# Altium PCB PCB_DCDC_Test.PcbDoc
Units mil, origin at the board's own origin, x right, y up, seen from the top; angles counter-clockwise.
Board outline 3670 x 2420 mil, 2 copper layers (Top Layer, Bottom Layer); 19 components, 13 nets, 53 pads, 8 vias.
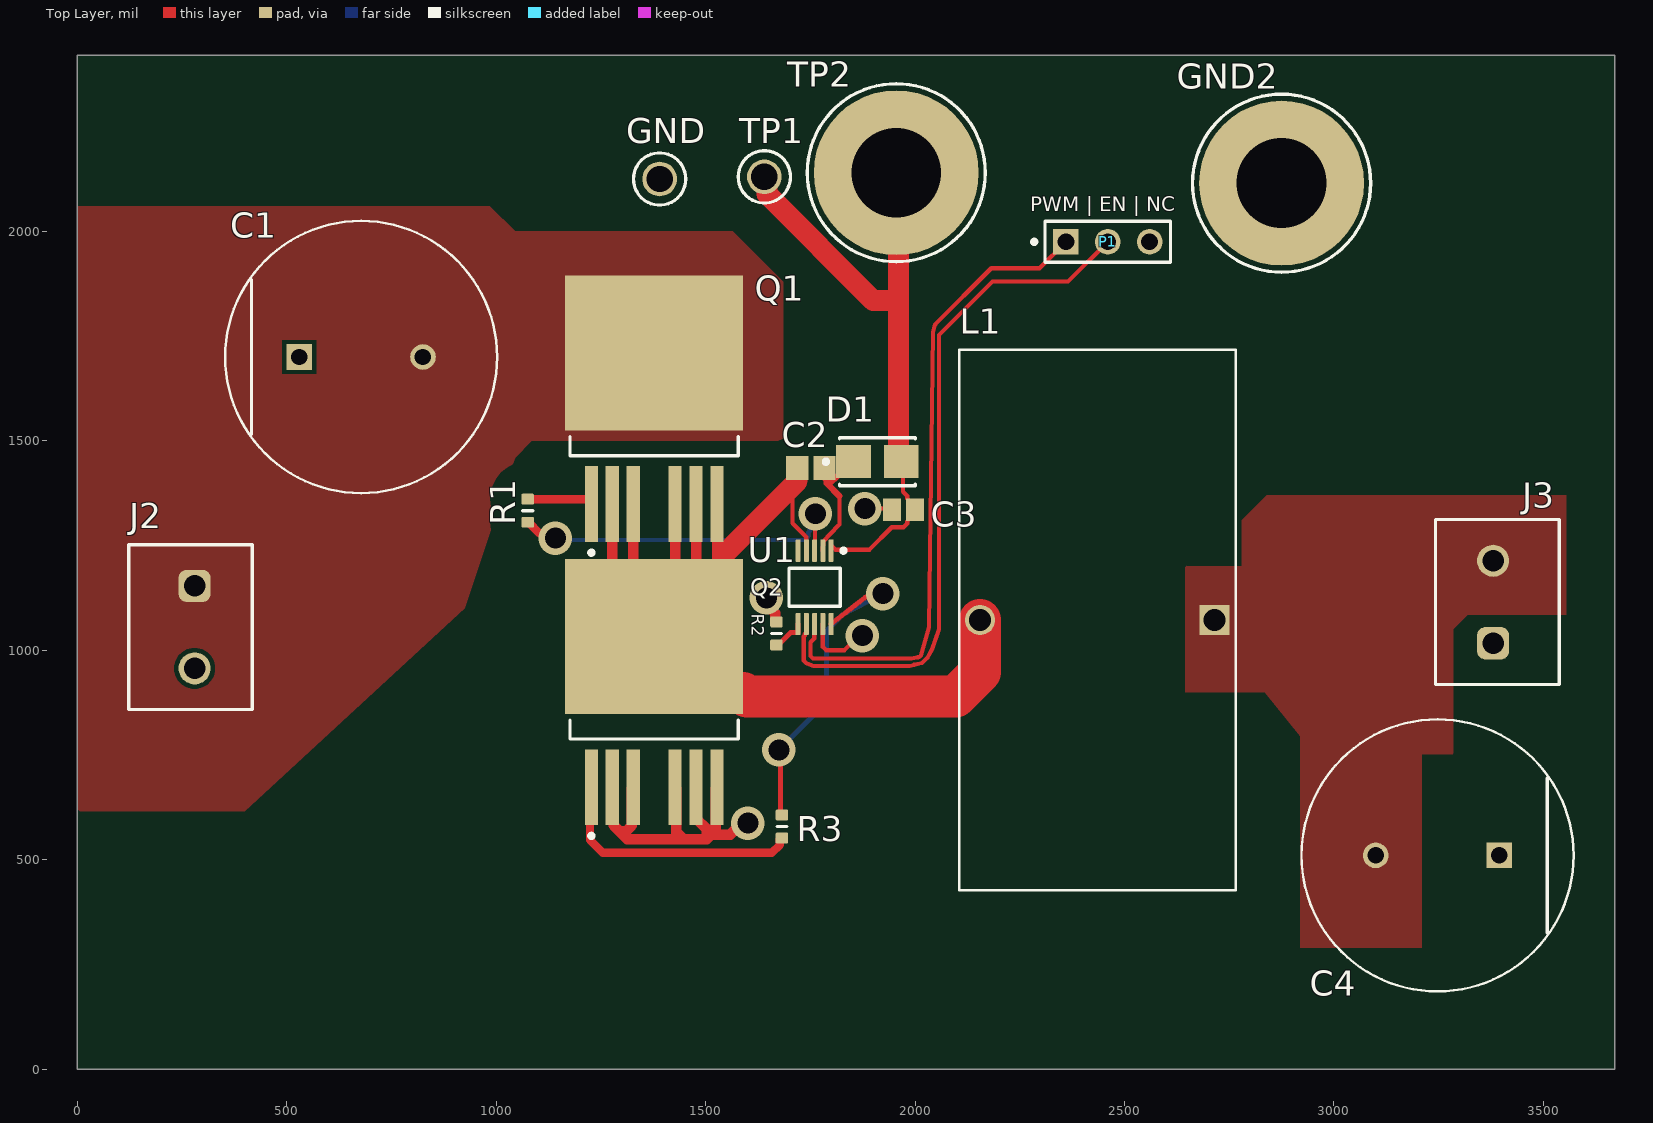
[diagram p0: Top Layer view]
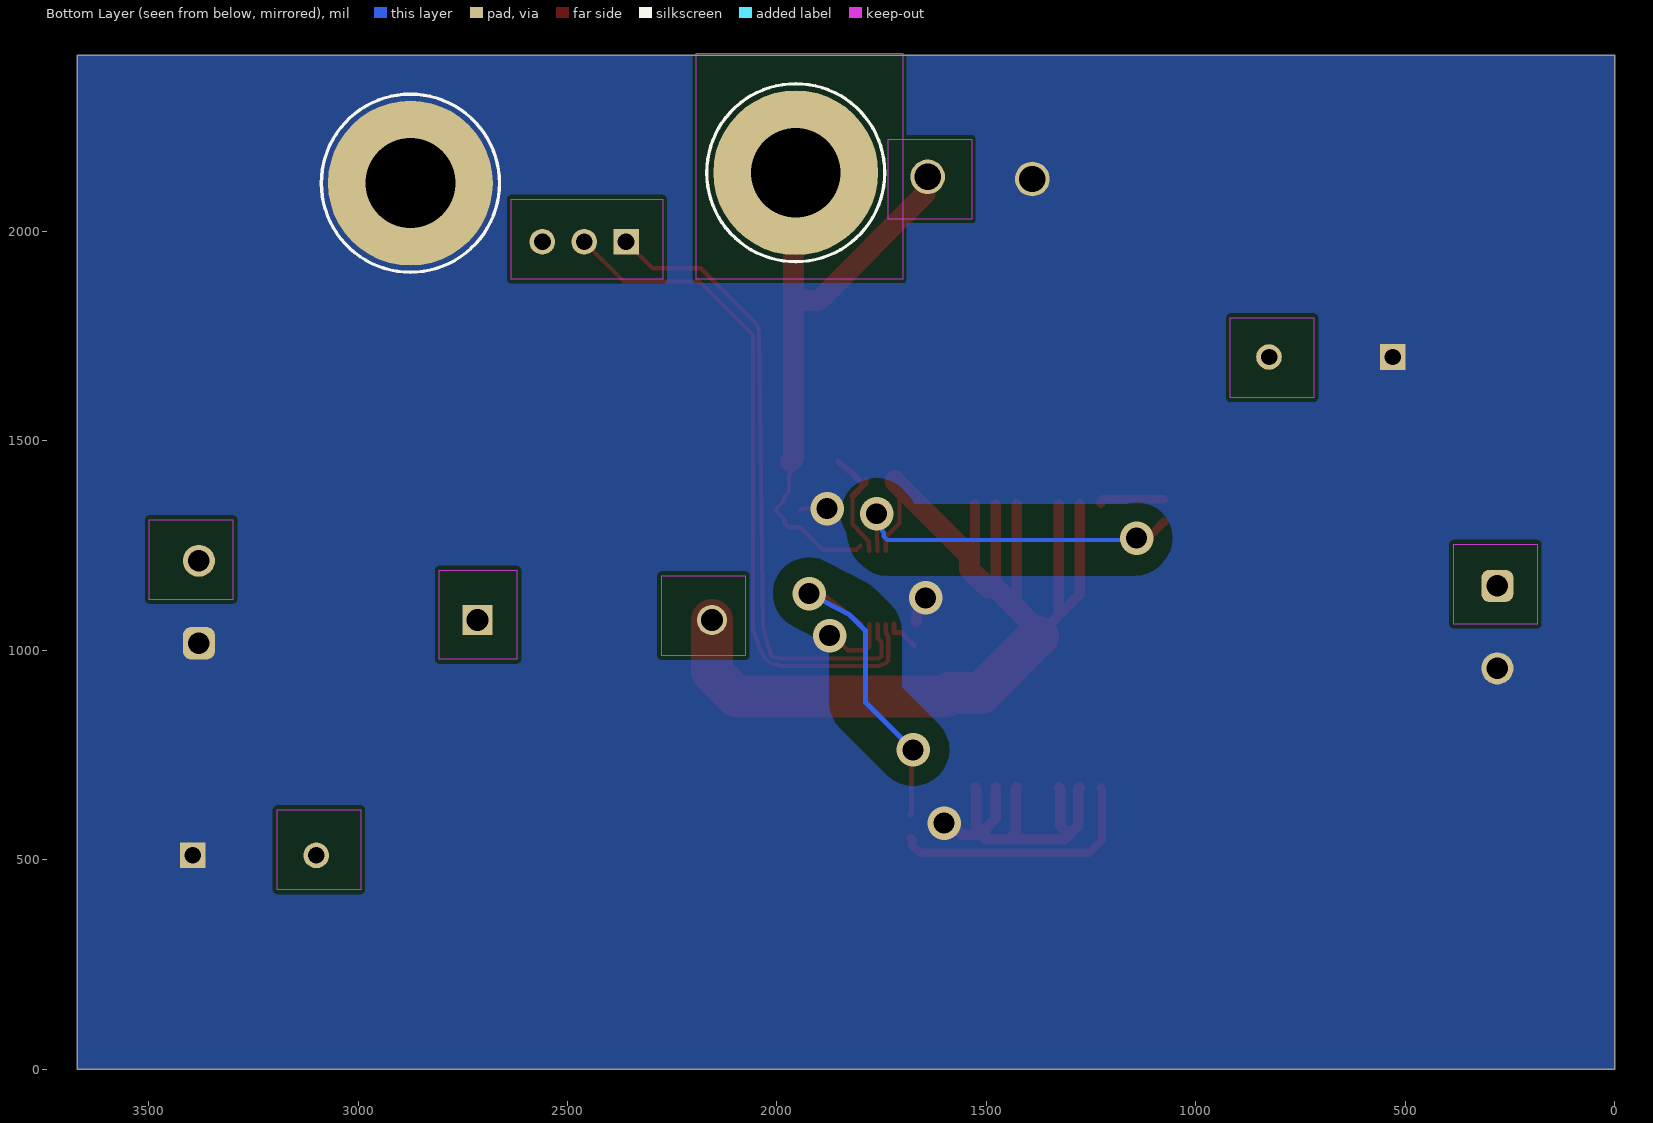
[diagram p1: Bottom Layer view, seen from below]
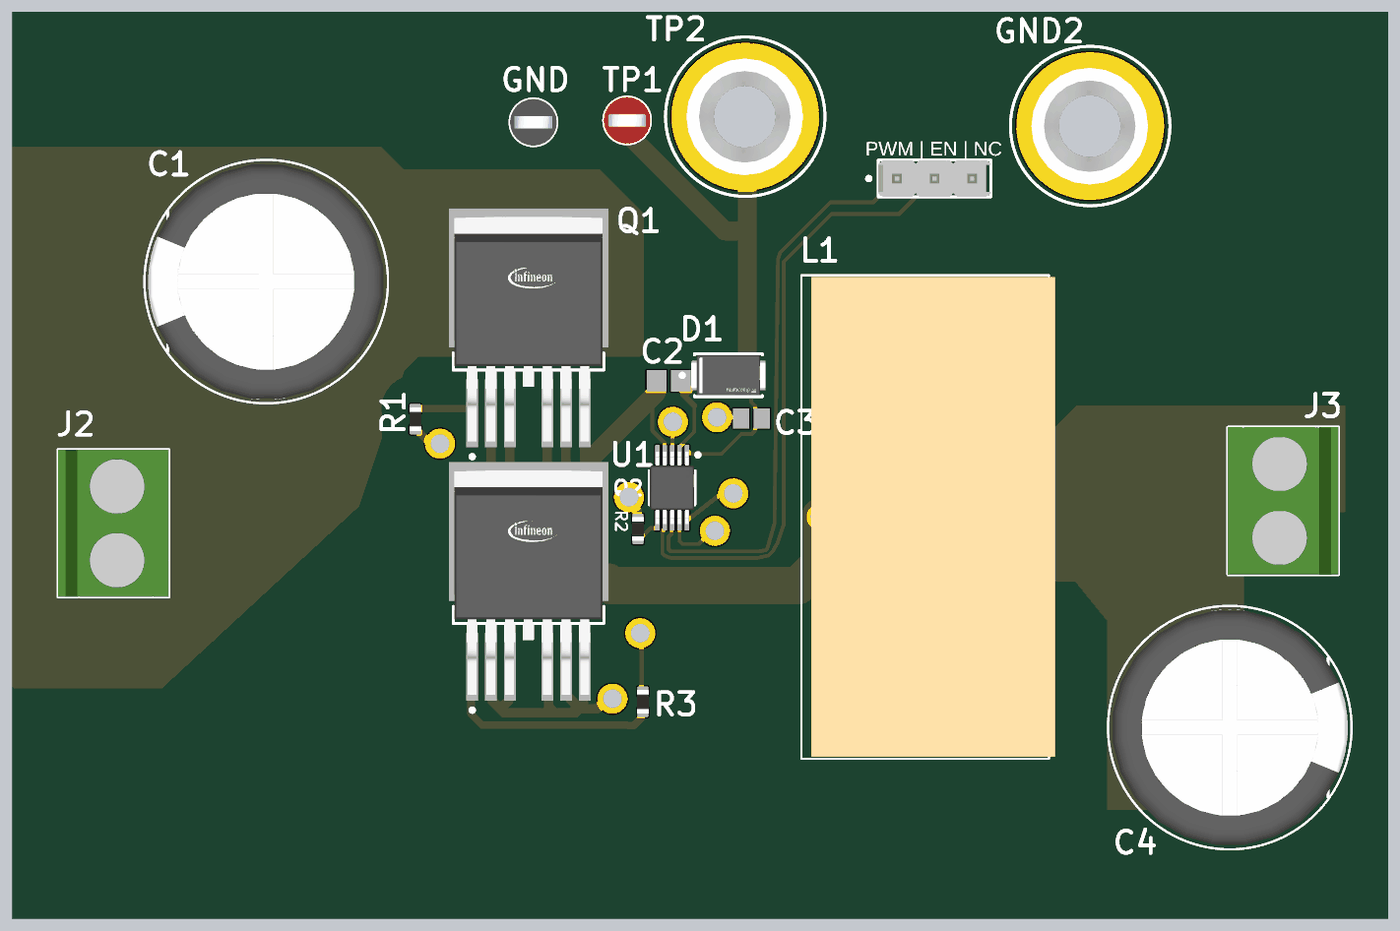
[diagram p2: 3D render of the assembled board from above, using the file's embedded part models]

## Layer stack, top to bottom
Top Solder: solder mask 0.4, Solder Resist, Dk 3.5
Top Layer: signal copper 1.4
Dielectric 1: core 12.6, FR-4, Dk 4.8
Bottom Layer: signal copper 1.4
Bottom Solder: solder mask 0.4, Solder Resist, Dk 3.5

## Board outline
0,0 3670,0 3670,2420 0,2420

## Design rules (kind name [scope] priority, off if disabled: settings)
AssemblyTestPointUsage [All] p1: isadvanced=TRUE
AssemblyTestpoint [All] p1: isadvanced=TRUE testpointundercomponent=TRUE minsize=40 maxsize=100 preferedsize=60 minholesize=0 maxholesize=40 preferedholesize=32 testpointgrid=1 usegrid=TRUE gridtolerance=0.01 allowsidetop=TRUE allowsidebottom=TRUE
Clearance Clearance_2 [InComponent('U1')] p1: isadvanced=TRUE gap=10 ignorepadtopadclearanceinfootprint=TRUE except(0: Arc-Arc Arc-Track Arc-SMDPad Arc-Text Track-Track Track-SMDPad Track-THPad Track-Via Track-Text SMDPad-SMDPad SMDPad-Text Text-Text)
Clearance Clearance_3 [All] p2: isadvanced=TRUE gap=10 ignorepadtopadclearanceinfootprint=TRUE except(5: Arc-Arc Arc-Track Arc-Text Track-Track Track-Text Text-Text; 80: Track-Poly)
Clearance Clearance_1 [OnMid vs OnMid] p3: gap=10 ignorepadtopadclearanceinfootprint=FALSE sourcerule=44 cellrowname=All cellrowtype=0 cellcolname=All cellcoltype=0 innerlayers=TRUE
Clearance Clearance_2 [(ExistsOnLayer('Top Layer') Or ExistsOnLayer('Bottom Layer')) vs (ExistsOnLayer('Top Layer') Or ExistsOnLayer('Bottom Layer'))] p4: gap=10 ignorepadtopadclearanceinfootprint=FALSE sourcerule=44 cellrowname=All cellrowtype=0 cellcolname=All cellcoltype=0 outerlayers=TRUE
Clearance [All] p5: gap=10 ignorepadtopadclearanceinfootprint=FALSE ismatrix=TRUE
ComponentClearance [All] p1: isadvanced=TRUE gap=10 collisioncheckmode=3 verticalgap=10 showdistances=FALSE
FabricationTestPointUsage [All] p1: isadvanced=TRUE valid=0 allowmultiple=FALSE
FabricationTestpoint [All] p1: isadvanced=TRUE side=3 testpointundercomponent=TRUE minsize=40 maxsize=100 preferedsize=60 minholesize=0 maxholesize=40 preferedholesize=32 testpointgrid=1 allowsidetop=TRUE allowsidebottom=TRUE usegrid=TRUE gridtolerance=0.01
FanoutControl Fanout_BGA [IsBGA] p1: isadvanced=TRUE bgadir=Out bgaviamode=Centered fanoutstyle=Auto fanoutdirection=Alternating viagrid=1 // Fanout_BGA (Default Rule)
FanoutControl Fanout_LCC [IsLCC] p2: isadvanced=TRUE bgadir=Out bgaviamode=Centered fanoutstyle=Auto fanoutdirection=Alternating viagrid=1 // Fanout_LCC (Default Rule)
FanoutControl Fanout_SOIC [IsSOIC] p3: isadvanced=TRUE bgadir=Out bgaviamode=Centered fanoutstyle=Auto fanoutdirection=Alternating viagrid=1 // Fanout_SOIC (Default Rule)
FanoutControl Fanout_Small [(CompPinCount < 5)] p4: isadvanced=TRUE bgadir=Out bgaviamode=Centered fanoutstyle=Auto fanoutdirection=OutThenIn viagrid=1 // Fanout_Small (Default Rule)
FanoutControl Fanout_Default [All] p5: isadvanced=TRUE bgadir=Out bgaviamode=Centered fanoutstyle=Auto fanoutdirection=Alternating viagrid=1 // Fanout_Default (Default Rule)
Height MaxMinHeight_1 [InComponent('L1')] p1: isadvanced=TRUE minheight=0 maxheight=10000 prefheight=5000
Height [All] p2: isadvanced=TRUE minheight=0 maxheight=1000 prefheight=500
HoleSize [All] p1 off: isadvanced=TRUE absolutevalues=TRUE maxlimit=100 minlimit=1 maxpercent=80.000 minpercent=20.000
HoleToHoleClearance [All] p1: isadvanced=TRUE gap=10 allowstackedmicrovias=TRUE
LayerPairs [All] p1: isadvanced=TRUE enforce=TRUE
MinimumSolderMaskSliver [All] p1 off: isadvanced=TRUE minsoldermaskwidth=10
NetAntennae [All] p1: isadvanced=TRUE netantennaetolerance=0
PasteMaskExpansion [All] p1: isadvanced=TRUE expansion=0
PlaneClearance [All] p1: isadvanced=TRUE clearance=20
PlaneConnect [All] p1: isadvanced=TRUE planeconnectstyle=Direct reliefexpansion=20 reliefentries=4 reliefconductorwidth=10 reliefairgap=10
PolygonConnect [All] p1: connectstyle=Direct reliefconductorwidth=10 reliefentries=4 polygonreliefangle="90 Angle" airgapwidth=10
RoutingCorners [All] p1: isadvanced=TRUE cornerstyle=45-Degree minsetback=100 maxsetback=100
RoutingPriority [All] p1: isadvanced=TRUE routingpriority=0
RoutingVias [All] p1: holewidth=28 width=50 viastyle="Through Hole" minholewidth=28 minwidth=50 maxholewidth=28 maxwidth=50
ShortCircuit [All] p1: isadvanced=TRUE allowed=FALSE
SilkToSilkClearance [All] p1 off: isadvanced=TRUE silktosilkclearance=5
SilkToSolderMaskClearance [IsPad] p1 off: isadvanced=TRUE minsilkscreentomaskgap=10 clearancetoexposedcopper=TRUE
SolderMaskExpansion [All] p1: isadvanced=TRUE expansion=4 istentingtop=FALSE
SupplyNets "Schematic Supply Nets_7" [InNet('GND')] p1: isadvanced=TRUE voltage=0.000
SupplyNets "Schematic Supply Nets_2" [InNet('GND_SIGNAL')] p2: isadvanced=TRUE voltage=0.000
SupplyNets "Schematic Supply Nets_4" [InNet('12V')] p3: isadvanced=TRUE voltage=0.000
UnRoutedNet [All] p1: isadvanced=TRUE
UnpouredPolygon [All] p1: isadvanced=TRUE
Width MaxMinWidth_2 [InNet('SW')] p1: isadvanced=TRUE maxlimit=100 minlimit=10 preferedwidth=10 minimp=50.000000 maximp=50.000000 favimp=50.000000
Width MaxMinWidth_1 [All] p2: isadvanced=TRUE maxlimit=50 minlimit=10 preferedwidth=10 minimp=50.000000 maximp=50.000000 favimp=50.000000
Width [All] p3: maxlimit=10 minlimit=10 preferedwidth=10
4 further rules are at their usual default settings.

## Components (designator, comment, footprint, x,y, rotation, side; value= is the part's Value field where it differs from the comment)
C1 "EEUFC2A471" FP-RAD-TH-D_16_0_5-L_40_2-MFG 677.36,1700 r0 top
C2 "08051C153KAT2A" CAPC2013X94X50NL20T25 1751,1435 r0 top
C3 "150nF" CAPC2013X140X50LL20T25 1972.09,1335 r0 top
C4 "EEUFC2A471" FP-RAD-TH-D_16_0_5-L_40_2-MFG 3247.36,510 r180 top
D1 "1N4007 SMD" FP-1N4007_SMD-IPC_C 1910,1450 r0 top
GND "5011" KSTN-5011_V 1390,2125 r0 top
GND2 "575-4" KSTN-575-4 2875,2115 r0 top
J2 "691137710002" 691137710002 270,1055 r270 top
J3 "691137710002" 691137710002 3390,1115 r90 top
L1 "120uH" IND_2300HT-V_56_42 2715,1072 r180 top
P1 "22-28-4033" MOLX-22-28-4033_V 2460,1975 r0 top
Q1 "IPB032N10N5ATMA1" FP-PG-TO263-7-MFG 1377,1650.18 r0 top
Q2 "IPB032N10N5ATMA1" FP-PG-TO263-7-MFG 1377,974 r0 top
R1 "0R3J" RESC0603(1608)_L 1075,1333 r90 top value=0
R2 "0R3J" RESC0603(1608)_L 1669,1040 r270 top value=0
R3 "0R3J" RESC0603(1608)_L 1682,579 r270 top value=0
TP1 "5010" KSTN-5010_V 1640,2130 r0 top
TP2 "575-4" KSTN-575-4 1955,2140 r0 top
U1 "LM5106MM/NOPB" DGS0010A_N 1760,1150 r270 top

## Footprints (in the part's own frame and the unit in brackets; to place one, negate y for a bottom-side part, rotate by r counter-clockwise, add the part's x,y. Pads: shape width x height; smd on the part's side, far side on the other; paste and mask are expansions set on the pad)
691137710002 [mm] "Horizontal Cable Entry with Pressure Clamp, pitch 5mm, 02p"
  rrect50% 1.95x1.95 hole 1.3: 1(-2.5,0.25)
  round 1.95 hole 1.3: 2(2.5,0.25)
  silkscreen extent -5,-3.75 5,3.75, body extent -5,-3.75 5,3.75, height 11.6
CAPC2013X94X50NL20T25 [mm] "Chip Capacitor, 2-Leads, Body 2.01x1.25mm, IPC Medium Density"
  rect 1.35x1.45 smd: 1(-0.825,0) 2(0.825,0)
  body extent -1.1,-0.72 1.11,0.72, height 0.94
CAPC2013X140X50LL20T25 [mm] "Chip Capacitor, 2-Leads, Body 2.00x1.25mm, IPC High Density"
  rect 1.1x1.35 smd: 1(-0.7,0) 2(0.7,0)
  body extent -1.1,-0.72 1.1,0.72, height 1.4
DGS0010A_N [mm] "SOP, 10-Leads, Body 3.1x3.1mm, Pitch 0.5mm, IPC Medium Density"
  rrect33% 1.35x0.3 smd: 1(-2.225,1) 2(-2.225,0.5) 3(-2.225,0) 4(-2.225,-0.5) 5(-2.225,-1) 6(2.225,-1) 7(2.225,-0.5) 8(2.225,0) 9(2.225,0.5) 10(2.225,1)
  silkscreen extent -2.35,-1.55 1.15,1.88, body extent -2.45,-1.5 2.45,1.5, height 0.94
FP-1N4007_SMD-IPC_C [mm]
  rect 2.1x2 smd paste+0 mask+0: 1(-1.45,0) 2(1.45,0)
  silkscreen extent -3.25,-1.45 2.3,1.45, body extent -2.6,-1.55 2.6,1.55, height 0.25
FP-PG-TO263-7-MFG [mm]
  rect 0.8x4.6 smd paste+0 mask+0: 1(-3.81,-7.65) 2(-2.54,-7.65) 3(-1.27,-7.65) 5(1.27,-7.65) 6(2.54,-7.65) 7(3.81,-7.65)
  rect 10.8x9.4 smd paste+0 mask+0: 8(0,1.5)
  silkscreen extent -5.1,-10.72 5.1,-3.58, body extent -5.5,-10.05 5.5,6.3, height 0.25
FP-RAD-TH-D_16_0_5-L_40_2-MFG [mm]
  rect 1.55x1.55 hole 1 paste-2539.97 mask+0: 1(-3.75,0)
  round 1.55 hole 1 paste-2539.97 mask+0: 2(3.75,0)
  silkscreen extent -8.25,-8.25 8.25,8.25, body extent -8.35,-8.35 8.35,8.35, height 0.25
IND_2300HT-V_56_42 [mil]
  rect 72x72 / inner round 60 / far side rect 72x72 hole 52 paste-99999 mask+0: 1(0,0)
  round 72 / inner round 60 / far side round 72 hole 52 paste-99999 mask+0: 2(560,0)
  silkscreen extent -50,-645 610,645, body extent -66,-640 584,640, height 1280
KSTN-575-4 [mm] "Banana Jack, Non-Insulated, Dia 7.92mm"
  round 10 hole 5.45: 1(0,0)
  silkscreen extent -5.4,-5.4 5.4,5.4, body extent -3.98,-3.96 3.92,3.94, height 2.36
KSTN-5010_V [mm] "Test Point, Dia 3.17mm"
  round 2.1 hole 1.6: 1(0,0)
  silkscreen extent -1.59,-1.58 1.59,1.58, body extent -1.59,-1.59 1.59,1.59, height 8.13
KSTN-5011_V [mm] "Test Point, Dia 3.17mm"
  round 2.1 hole 1.6: 1(0,0)
  silkscreen extent -1.59,-1.58 1.59,1.58, body extent -1.59,-1.59 1.59,1.59, height 8.13
MOLX-22-28-4033_V [mm] "THD, 3-Leads, Body 7.62x2.49mm, Pitch 2.54mm"
  rect 1.55x1.55 hole 1.02: 1(-2.54,0)
  round 1.55 hole 1.02: 2(0,0) 3(2.54,0)
  silkscreen extent -4.58,-1.24 3.81,1.24, body extent -3.81,-1.24 3.81,1.24, height 8.38
RESC0603(1608)_L [mil] "Chip Resistor, Body 1.6x0.8mm, IPC High Density"
  rrect25% 26x29.92 smd: 1(-27.56,0) 2(27.56,0)
  silkscreen extent 0,-12 0,12, body extent -31,-16 31,16, height 18

## Part data
C1 C4: library part CMP-05427-000270-1, "Aluminum Electrolytic Capacitors (Radial Lead Type) AEC-Q200 Qualified 470uF ±20% 100V", Capacitance=470uF, Case/Package=Radial, Dielectric Material=Aluminium, ESR (Equivalent Series Resistance)=47mR, Leakage Current=3uA, Max Operating Temperature=105°C, Min Operating Temperature=-55°C, Package Quantity=100, Ratings=AEC-Q200, Ripple Current=1.92A, Tolerance=20%, Voltage=100V, Construction=RADIAL, Contact Plating=Tin, Diameter=16mm, Height=40mm, Height - Seated (Max)=1.575inch, Impedance=47mR, Lead Diameter=0.8mm, Lead Free="Lead Free", Lead Pitch=7.5mm, Length=40mm, Life (Hours)=5000Hour, Mount="Through Hole", Packaging=Bulk, Polarity=Polar, Radiation Hardening=No, REACH SVHC="No SVHC", RoHS Compliant=Yes, Series=FC, Termination=Radial, Voltage Rating=100V, Voltage Rating (DC)=100V
C2: library part CMP-2007-04180-1, Manufacturer="AVX Interconnect / Elco", Part Number=08051C153KAT2A
C3: library part CMP-1036-04480-3, "08053C154KAT2A", Manufacturer="AVX Interconnect / Elco", Part Number=08053C154KAT2A
D1: library part CMP-12389-000001-1, "Rectifier, 1Kv, 1A, Do-214Ac Rohs Compliant: Yes"
GND: library part CMP-1672-00003-4, "Test Point, Black, Through Hole, RoHS, Bulk", Colour=Black, Manufacturer=Keystone, Package Quantity=100, ComponentLink1Description="Manufacturer URL", ComponentLink1URL=http://www.keyelco.com/, ComponentLink2Description=Datasheet, ComponentLink2URL=http://www.keyelco.com/product-pdf.cfm?p=1320, Contact Material=Bronze, Contact Plating=Silver, DatasheetVersion="Rev. F, 12/2013", Height="8.12 mm", Mount="Through Hole", Mounting Technology="Through Hole", PackageDescription="1-Pin Through Hole Device, Dia 3.17 mm", PackageReference=5011, Packaging=Bulk, Pins=1, REACH SVHC="No SVHC", RoHSCompliant=true
GND2 TP2: library part CMP-2000-05649-1, "Banana Jack, Non-Insulated, 1-Pin THD, RoHS, Bulk", Color=-, Manufacturer=Keystone-Electronics, Package Description="1-Pin Through Hole Device, Dia 7.92 mm", Package Version="Rev. B, 11/1994", Body Material=-, Category=Connectors,Interconnects, Contact Finish=Nickel, Contact Material=Brass, Datasheet URL=http://www.keyelco.com/product-pdf.cfm?p=2379, Datasheet Version="Rev. B, 11/1994", Family=BananaandTipConnectors-Jacks,Plugs, Features=-, Gender=Female, Insulation=Non-Insulated, Manufacturer URL=http://www.keyelco.com/, Mounting Technology=ThroughHole, Mounting Type=ThroughHole, Operating Temperature=-, Package Reference=575-4, Package URL=http://www.keyelco.com/product-pdf.cfm?p=2379, Packaging=Bulk, Plug/Mating Plug Diameter=StandardBanana, Series=-, Termination=Solder, Type=BananaJack, Wire Gauge=-
J2 J3: library part CMP-1502-03324-2, Current Rating=16A, Max Operating Temperature=120°C, Min Operating Temperature=-30°C, Voltage Rating=300V, Contact Material="Nickel, Tin", Height=11.6mm, Lead Pitch=5mm, NexarPartId=78871135, Number of Contacts=2, Number of Pins=2, Number of Rows=1, Packaging=Box, RoHS=Non-Compliant
L1: library part 2300HT-121-V-RC, "120uH / 2300HT-121-V-RC", Mfr_Name="Bourns Electronics"
P1: library part CMP-1676-00001-5, "Male Header, Pitch 2.54 mm, 1 x 3 Position, Height 8.38 mm, Tail Length 3.18 mm, RoHS, Bulk", Colour=Black, Current Rating="4 A", Manufacturer=Molex, Max Operating Temperature="75 degC", Min Operating Temperature="0 degC", Package Quantity=1, Voltage Rating="250 V", ComponentLink1Description="Manufacturer URL", ComponentLink1URL=http://www.molex.com/, ComponentLink2Description=Datasheet, ComponentLink2URL=http://www.molex.com/pdm_docs/sd/022284033_sd.pdf, Contact Finish=Gold, Contact Material=Brass, Contact Plating=Gold, DatasheetVersion="Rev. G, 01/2012", Height="8.38 mm", Lead Pitch="0.1 inch", Length="7.62 mm", Mount="Through Hole", Mounting Technology="Through Hole", PackageDescription="Male Header, Pitch 2.54 mm, 1 x 3 Position, Height 8.38 mm, Tail Length 3.18 mm", PackageReference=22-28-4033, Packaging=Bulk, Pins=3, REACH SVHC=Unknown, RoHSCompliant=true, Rows=1
Q1 Q2: library part CMP-32901-001276-1, "MOSFET N-CH 100V 166A TO263-7", Case/Package=TO-263-7, Continuous Drain Current (ID)=166A, Drain to Source Voltage (Vdss)=100V, Input Capacitance=6.97nF, Max Operating Temperature=175°C, Max Power Dissipation=187W, Min Operating Temperature=-55°C, Halogen Free="Halogen Free", Lead Free="Contains Lead", Max Dual Supply Voltage=100V, Mount="Surface Mount", Packaging="Tape and Reel", Rds On Max=3.2mR, RoHS Compliant=Yes, Series=OptiMOS™
R1 R2 R3: library part CMP-009-00063-2, "Jumper 0603 (1608 Metric)", Case/Package=0603, Mounting Technology=SMT, Pins=2
TP1: library part CMP-1672-00002-4, "Test Point, Red, Through Hole, RoHS, Bulk", Colour=Red, Manufacturer=Keystone, Package Quantity=100, ComponentLink1Description="Manufacturer URL", ComponentLink1URL=http://www.keyelco.com/, ComponentLink2Description=Datasheet, ComponentLink2URL=http://www.keyelco.com/product-pdf.cfm?p=1319, Contact Material=Bronze, Contact Plating=Silver, DatasheetVersion="Rev. F, 12/2013", Height="8.12 mm", Mount="Through Hole", Mounting Technology="Through Hole", PackageDescription="1-Pin Through Hole Device, Dia 3.17 mm", PackageReference=5010, Packaging=Bulk, Pins=1, REACH SVHC="No SVHC", RoHSCompliant=true
U1: library part CMP-0063-01354-3, "100V Half-Bridge Gate Driver with Programmable Dead-Time, 10-pin MSOP, Pb-Free", Manufacturer="Texas Instruments", PackageTopMarking=ZXTT*5106, PowerWise=N, Code_JEDEC=MO-187-BA, ComponentLink1Description="Datasheet URL", ComponentLink1URL=http://www.ti.com/general/docs/lit/getliterature.tsp?genericPartNumber=LM5106&fileType=pdf, CompType=MiscPower, PackageDescription="Mini-SO, Molded, .118 x .118 x .034in Body, 10 Lead, .0197in Pitch", PackageReference=DGS0010A, PinCount=10, RoHS=Y

## Via types
v1: diameter 80, hole 50, Top Layer to Bottom Layer, 8 vias

## Nets (pads, with @x,y where several pads share a name; then routed paths per layer and width w, separated by ;. In a path a pad name is that pad's centre, name@x,y a point inside that pad or via, vN(x,y) a via of type N, cw(c..) or ccw(c..) an arc to the next point about the centre after c; other vN are vias at no path point)
12V: C3.2 D1.2 TP1.1 TP2.1 U1.1 | length 1547.4
  Top Layer w10: U1.1@1800.59,1249.41 1810,1240 1890.77,1240 1944.19,1293.43 1972.4,1293.43 1981.19,1302.21 1981.19,1307.57 1983,1309.38 1983,1313.43 C3.2@2004.57,1335 ; D1.2 1959.5,1448.42 1955.22,1444.14 1955.22,1436.68 1970.75,1421.16 1970.75,1378.23 1981.19,1367.79 1981.19,1362.43 1983,1360.62 1983,1356.57 C3.2@2004.57,1335 ; C3.2@2004.57,1335 2004.88,1335 C3.2@2004.57,1335
  Top Layer w50: TP1.1 1646.25,2123.75 1646.25,2088.75 1900,1835 1960,1835 ; TP2.1@1960,2135 1960,1835 ; D1.2 1960,1457.09 1960,1835
GND: C1.1 C3.1 C4.1 GND2.1 GND.1 J2.2 J3.1 Q2.2 Q2.3 Q2.5 Q2.6 Q2.7 R2.1 U1.9 | length 1230.9
  Top Layer w10: U1.9 1779.69,1007.31 1787,1000 1831.35,1000 1866.35,1035 v1(1874.13,1035) ; v1(1880,1338) 1941.53,1338 C3.1
  Top Layer w25: Q2.2 1280.25,669.57 1280.25,581.45 1294.2,567.5 ; Q2.3 1323.75,669.57 1323.75,581.45 1309.8,567.5 1294.2,567.5 ; Q2.5 1430.25,669.57 1430.25,565.75 1447,549 ; Q2.6 1477,598.02 1502,573.02 1502,559.88 ; 1523.75,570.75 1523.75,669.57 Q2.7 ; v1(1601,587) 1586.12,587 1558.99,559.88 1512.88,559.88 1502,549 1447,549 ; v1(1645,1125) 1645,1110.12 1666.54,1088.58 1666.54,1068.06 1667.04,1067.56 R2.1 ; 1294.2,567.5 1312.7,549 1447,549
NetC1_2: C1.2 J2.1 Q1.8
NetC2_2: C2.2 D1.1 U1.2 | length 282.4
  Top Layer w10: U1.2 1780.59,1259.17 1816.63,1297.46 1819.35,1300.34 1819.35,1368.15 ; C2.2@1783.72,1407.84 1789.24,1401.82
  Top Layer w15: 1789.24,1402.33 1789.24,1401.82 1789.24,1398.25 1819.35,1368.15 ; 1793.02,1394.59 1819.08,1420.64 D1.1
NetC4_2: C4.2 J3.2 L1.1
NetP1_1: P1.1 U1.8 | length 1536.3
  Top Layer w10: U1.8 1759.09,1061.5 1759.09,1027.99 1750.17,1019.06 1750.17,990 1750.17,985.86 1756.03,980 1991.49,980 2006.84,982.99 2009.83,983.58 2013.82,987.56 2033.01,1054.36 2033.03,1055.7 2042.38,1758.59 2047.93,1777.93 2181.82,1911.82 2296.82,1911.82 P1.1
NetP1_2: P1.2 U1.7 | length 1666.1
  Top Layer w10: U1.7 1740.32,1041.73 1736.63,1038.05 1736.63,1035.29 1734,1032.66 1734,975 1739.86,969.14 1753.76,963.36 1757.6,962.59 1982.62,962.59 1986.72,962.59 1997.71,965 2005.49,966.89 2016.63,969.16 2028.82,981.35 2040.4,1001.59 2057.38,1049.96 2057.38,1752.38 2185,1880 2365,1880 P1.2
NetQ1_1: Q1.1 R1.2 | length 160.2
  Top Layer w20: R1.2 1221.25,1360.56 1227,1354.81 Q1.1
NetQ2_1: Q2.1 R3.2 | length 620.8
  Top Layer w20: Q2.1 1223.75,669.57 1223.75,546.72 1253.97,516.5 1640.5,516.5 1641.05,515.95 1657.62,515.95 1677.04,535.36 1677.04,548.44 1680.04,551.44 R3.2
NetR1_1: R1.1 U1.3 | length 844.1
  Top Layer w10: U1.3 1760,1258.27 1760.91,1259.17 1760.91,1324.69 v1(1762,1325.78)
  Top Layer w20: R1.1@1076.06,1306.5 R1.1 1076.96,1305.44 1103.36,1279.04 1129.52,1279.04 v1(1141,1267.56) v1@1139.94,1266.5
  Bottom Layer w10: v1(1141,1267.56) 1145.46,1263.1 1736.1,1263.1 1745.04,1272.04 1745.04,1281 1748.61,1284.57 1748.61,1312.39 v1(1762,1325.78)
NetR2_2: R2.2 U1.6 | length 82.9
  Top Layer w12: R2.2@1672.56,1010 1672.56,1011.96 1702.43,1041.83 1720.54,1041.83 1720.63,1041.92 U1.6
NetR3_1: R3.1 U1.10 | length 801.7
  Top Layer w12: v1(1675,762) 1678.5,758.5 1678.5,610.06 R3.1 ; U1.10 1860.43,1110.23 1879.05,1124.81 1905.17,1138.9 1909.96,1138.9 v1(1923,1135)
  Bottom Layer w12: v1(1675,762) 1788.5,875.5 1788.5,1046.43 1822.72,1080.65 1826.23,1084.17 v1(1923,1135)
SW: C2.1 L1.2 Q1.2 Q1.3 Q1.5 Q1.6 Q1.7 Q2.8 U1.4 | length 2851.2
  Top Layer w10: 1707,1365.48 1707,1303 1740.08,1269.92 1740.08,1237.83 U1.4
  Top Layer w25: Q1.2 1277,1133.06 Q2.8@1327,1083.06 ; Q1.3 Q2.8@1327,1083.06 ; Q2.8 Q2.8@1327,1083.06 ; Q2.8@1427,1098 Q1.5 ; Q2.8@1477,1148 Q1.6 ; 1527,1225 Q1.7
  Top Layer w50: Q2.8 1377,1048 1427,1098 1477,1148 1494.9,1148 1540,1193.1 1540,1225 1716.46,1401.46 1716.46,1402.94 1718.52,1405
  Top Layer w100: Q2.8 1512.04,898.02 1589.16,898.02 1598.18,889 2096.42,889 2155,947.58 L1.2
pads on no net: P1.3 U1.5

## Polygon pours and split planes (outlines as drawn)
NetC1_2 on Top Layer "NETC1_2_L01_P014" (solid, pour order 14): 0,2060 0,620 5,615 400,615 925,1100 1045,1460 1085,1500 1685,1500 1685,1880 1565,2000 1045,2000 985,2060
NetC4_2 on Top Layer "Top Layer-No Net" (solid, pour order 24): 3555,1085 3320,1085 3285,1050 3285,755 3289.98,751.13 3210,750 3210,290 2920,290 2920,795 2834.85,900 2645,900 2645,1201 2779.99,1200.68 2779.99,1309.99 2840,1370 3555,1370
GND on Bottom Layer "GND_L02_P021" (solid, pour order 21): 3670,2420 0,2420 0,0 3670,0

## Keep-outs
Bottom Layer:
  rectangle: 1700,1886 2192,2425
  rectangle: 2273,1886 2634,2077
  rectangle: 1535,2029 1734,2220
  rectangle: 185,1062 384,1253
  rectangle: 718,1603 917,1794
  rectangle: 3299,1121 3498,1312
  rectangle: 2994,428 3193,619
  rectangle: 2621,978 2806,1191
  rectangle: 2076,987 2275,1178

## Silkscreen, mask and mechanical layers (free items; w line width, h text height)
Top Overlay:
  text "PWM | EN | NC" at 2275,2036.27 h60